# Altium PCB valfancontrollerALT.PcbDoc
Units mm, origin at the board's own origin, x right, y up, seen from the top; angles counter-clockwise.
Board outline 99.06 x 48.89 mm, 2 copper layers (Top Layer, Bottom Layer); 11 components, 20 nets, 87 pads, 32 vias.
Unrouted connection lines stored in the file: 10.
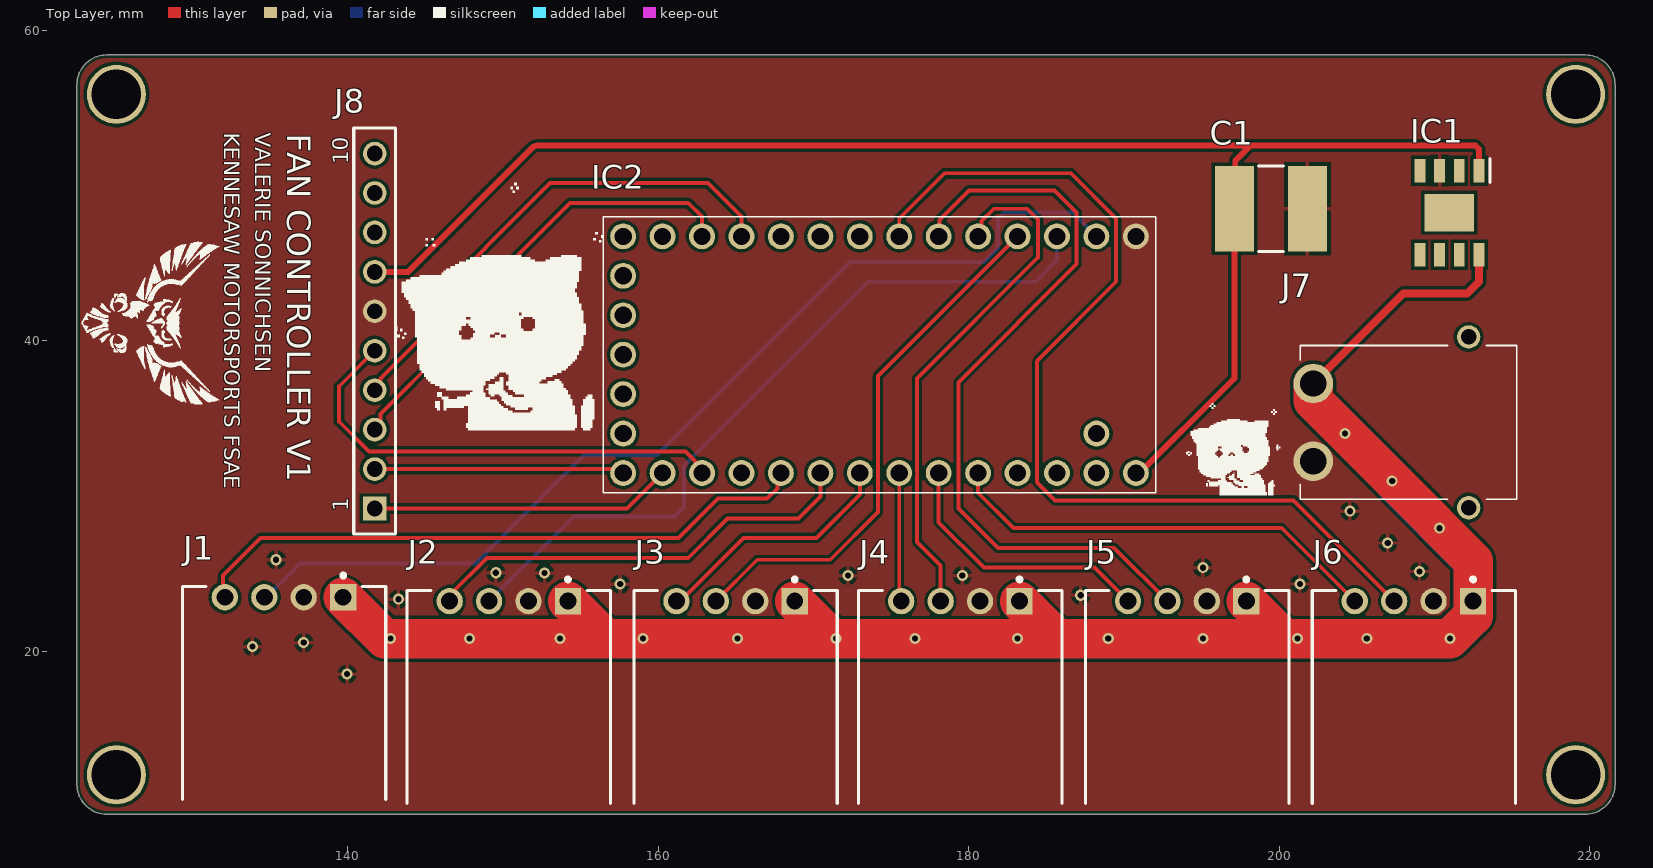
[diagram p0: Top Layer view]
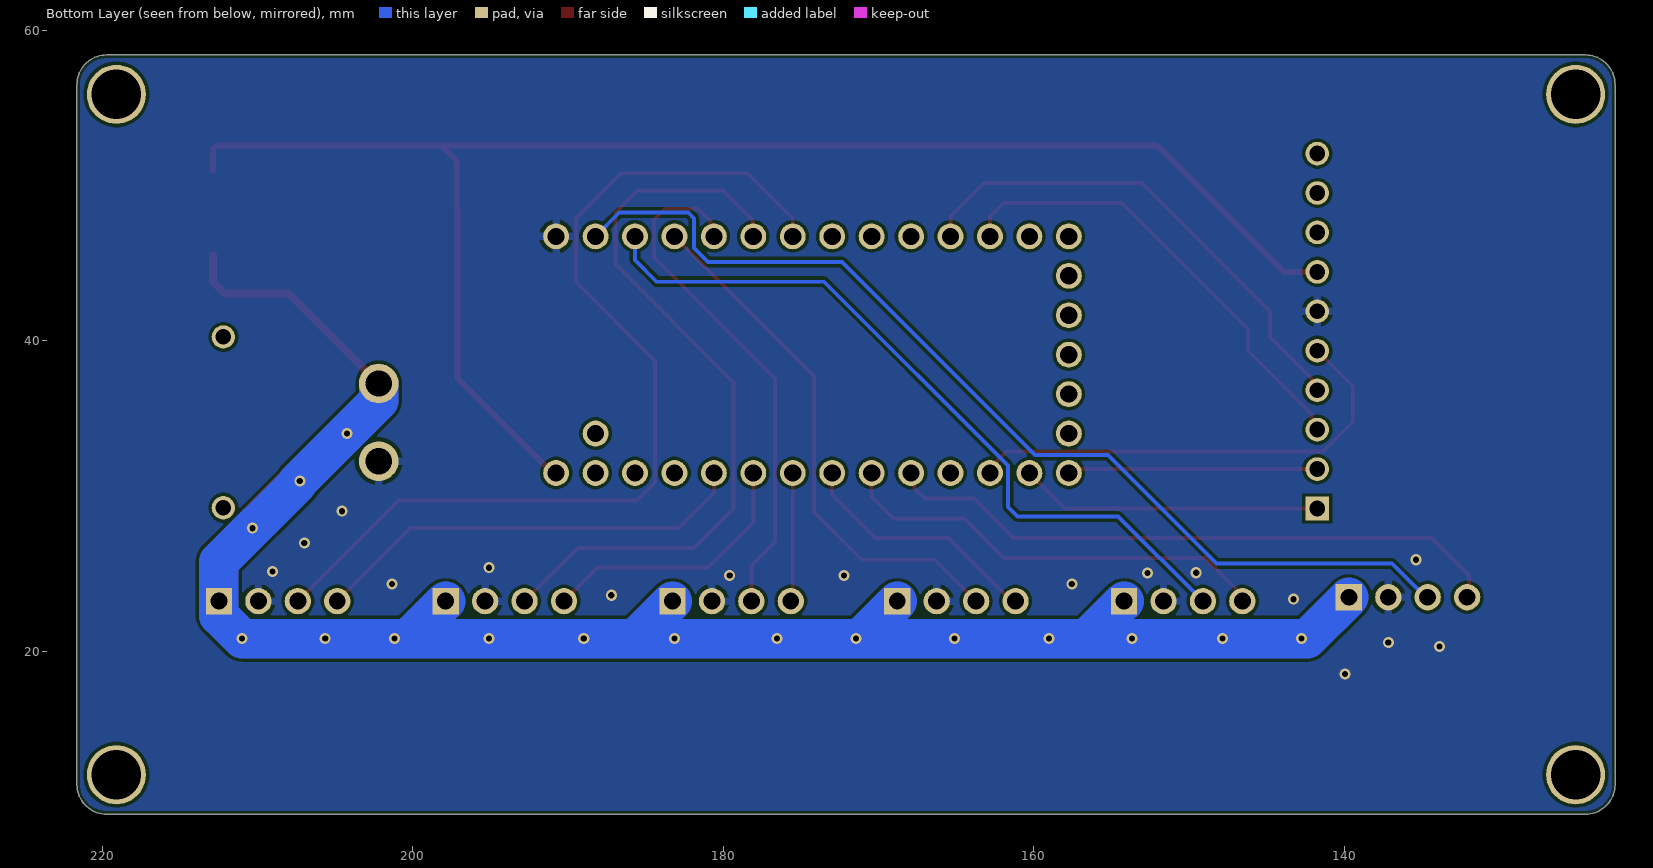
[diagram p1: Bottom Layer view, seen from below]
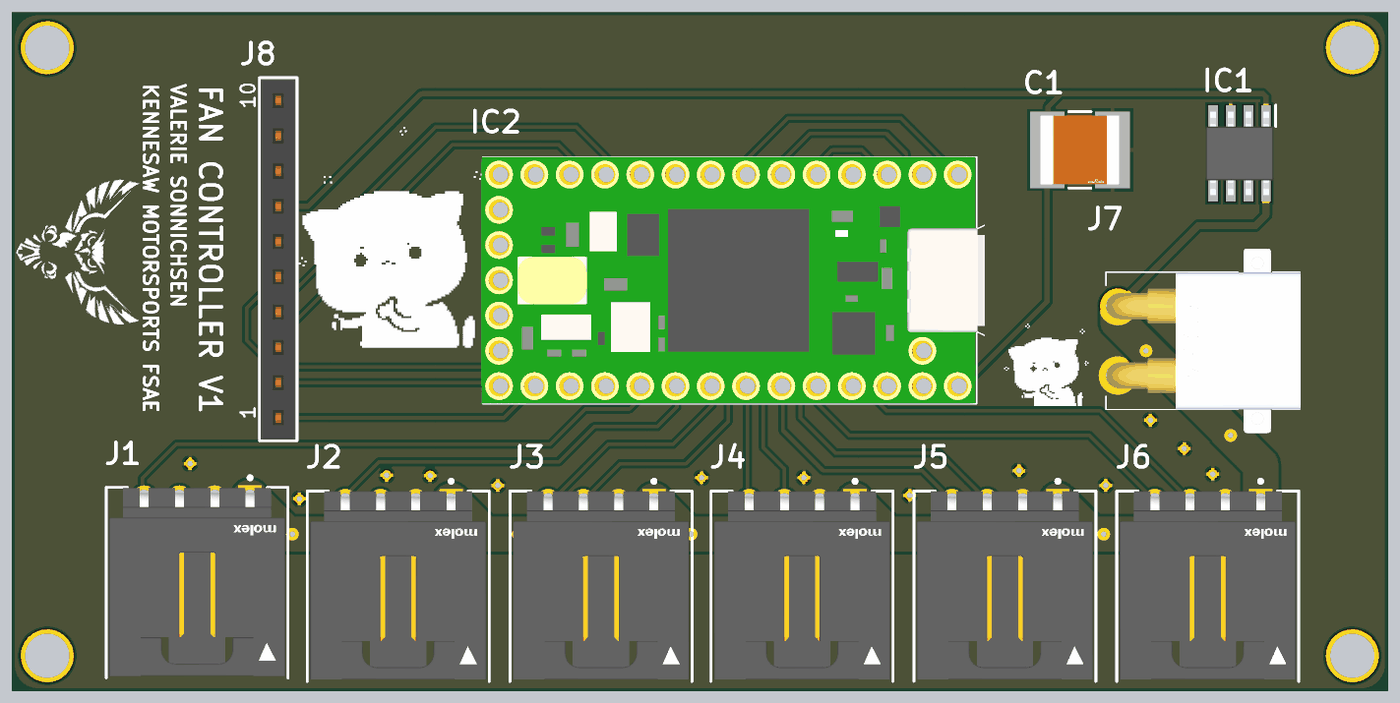
[diagram p2: 3D render of the assembled board from above, using the file's embedded part models]

## Layer stack, top to bottom
Top Solder: solder mask 0.0102, Solder Resist, Dk 3.5
Top Layer: signal copper 0.0356
Dielectric 1: dielectric 0.32, FR-4, Dk 4.8
Bottom Layer: signal copper 0.0356
Bottom Solder: solder mask 0.0102, Solder Resist, Dk 3.5

## Board outline
122.555,11.43 ccw(c124.46,11.43) 124.46,9.525 219.71,9.525 ccw(c219.71,11.43) 221.615,11.43 221.615,56.515 ccw(c219.71,56.515) 219.71,58.42 124.46,58.42 ccw(c124.46,56.515) 122.555,56.515

## Design rules (kind name [scope] priority, off if disabled: settings)
BoardOutlineClearance [All] p1: gap=0.2 ignorepadtopadclearanceinfootprint=FALSE except(0.4: Arc-SplitBarrior Arc-SplitContinuation Track-SplitBarrior Track-SplitContinuation SMDPad-SplitBarrior SMDPad-SplitContinuation THPad-SplitBarrior THPad-SplitContinuation Via-SplitBarrior Via-SplitContinuation Fill-SplitBarrior Fill-SplitContinuation Poly-SplitBarrior Poly-SplitContinuation Region-SplitBarrior Region-SplitContinuation Text-SplitBarrior Text-SplitContinuation)
Clearance "Clearance Bottom Layer" [OnLayer('Bottom Layer')] p1: gap=0.203 ignorepadtopadclearanceinfootprint=TRUE except(0.254: Arc-Text Track-Text SMDPad-Text THPad-Text Via-Text Fill-Text Poly-Text Region-Text Text-Text)
Clearance "Clearance Top Layer" [OnLayer('Top Layer')] p2: gap=0.203 ignorepadtopadclearanceinfootprint=TRUE except(0.254: Arc-Text Track-Text SMDPad-Text THPad-Text Via-Text Fill-Text Poly-Text Region-Text Text-Text)
Clearance [All] p3: gap=0.2 ignorepadtopadclearanceinfootprint=FALSE except(0.089: Arc-Arc Arc-Track Arc-SMDPad Track-Track Track-SMDPad SMDPad-SMDPad; 0.127: Arc-Via Track-Via SMDPad-Via THPad-Via Via-Via; 0.254: Arc-Text Track-Text SMDPad-Text THPad-Text Via-Text Fill-Text Poly-Text Region-Text Text-Text)
HoleSize [All] p1: absolutevalues=TRUE maxlimit=6.3 minlimit=0.2 maxpercent=80.000 minpercent=20.000
MinimumAnnularRing [All] p1: minimumring=0.076
MinimumSolderMaskSliver [All] p1: minsoldermaskwidth=0.1
PolygonConnect [All vs IsNamedPolygon('GND_L01_P001')] p1: thpad.connectstyle=Direct thpad.reliefconductorwidth=0.254 thpad.reliefentries=4 thpad.polygonreliefangle="90 Angle" thpad.airgapwidth=0.254 smdpad.connectstyle=Relief smdpad.reliefconductorwidth=0.254 smdpad.reliefentries=4 smdpad.polygonreliefangle="90 Angle" smdpad.airgapwidth=0.254 via.connectstyle=Relief via.reliefconductorwidth=0.254 via.reliefentries=4 via.polygonreliefangle="90 Angle" via.airgapwidth=0.254
PolygonConnect PolygonConnect_1 [All] p2: thpad.connectstyle=Relief thpad.reliefconductorwidth=0.508 thpad.reliefentries=4 thpad.polygonreliefangle="90 Angle" thpad.airgapwidth=0.254 smdpad.connectstyle=Relief smdpad.reliefconductorwidth=0.508 smdpad.reliefentries=4 smdpad.polygonreliefangle="90 Angle" smdpad.airgapwidth=0.254 via.connectstyle=Direct via.reliefconductorwidth=0.508 via.reliefentries=4 via.polygonreliefangle="90 Angle" via.airgapwidth=0.254
RoutingCorners [All] p1: cornerstyle=Round minsetback=2.54 maxsetback=2.54
RoutingVias [All] p1: holewidth=0.5 width=1 viastyle="Through Hole" minholewidth=0.2 minwidth=0.45 maxholewidth=1 maxwidth=2
SilkToSilkClearance [All] p1: silktosilkclearance=0.1
SilkToSolderMaskClearance [IsPad] p1: minsilkscreentomaskgap=0.1 clearancetoexposedcopper=TRUE
SolderMaskExpansion [All] p1: expansion=0.102 istentingtop=FALSE
Width [All] p1: maxlimit=2.54 minlimit=0.089 preferedwidth=0.381
25 further rules are at their usual default settings.

## Components (designator, comment, footprint, x,y, rotation, side; value= is the part's Value field where it differs from the comment)
C1 "GRM55DR72E105KW01L" FP-GRM55D-0_4-IPC_A 199.453,48.514 r0 top
IC1 "BD50GA5MEFJ-LBH2" SOIC127P600X100-9N 210.947,48.26 r270 top
IC2 "TEENSY_4.0" TEENSY40 190.754,46.736 r180 top
J1 "70553-0003" FP-70553-0003-MFG 135.89,17.399 r0 top
J2 "70553-0003" FP-70553-0003-MFG 150.368,17.145 r0 top
J3 "70553-0003" FP-70553-0003-MFG 164.973,17.145 r0 top
J4 "70553-0003" FP-70553-0003-MFG 179.451,17.145 r0 top
J5 "70553-0003" FP-70553-0003-MFG 194.056,17.145 r0 top
J6 "70553-0003" FP-70553-0003-MFG 208.661,17.145 r0 top
J7 "XT30PW-M" XT30PWM 208.096,34.758 r270 top
J8 "61301011821" 61301011821 141.732,40.64 r90 top (schematic designator J?)

## Footprints (in the part's own frame and the unit in brackets; to place one, negate y for a bottom-side part, rotate by r counter-clockwise, add the part's x,y. Pads: shape width x height; smd on the part's side, far side on the other; paste and mask are expansions set on the pad)
61301011821 [mm] "Socket Header, Pitch 2.54 mm, THT, Vertical, single row, 10p"
  rect 1.52x1.52 hole 1.02: 1(-11.43,0)
  round 1.52 hole 1.02: 2(-8.89,0) 3(-6.35,0) 4(-3.81,0) 5(-1.27,0) 6(1.27,0) 7(3.81,0) 8(6.35,0) 9(8.89,0) 10(11.43,0)
  silkscreen extent -13.08,-1.35 13.08,1.35, body extent -12.95,-1.25 12.95,1.25, height 8.55
FP-70553-0003-MFG [mm]
  rect 1.69x1.69 hole 1.09 paste-1000 mask+0: 1(3.81,6.095)
  round 1.69 hole 1.09 paste-1000 mask+0: 2(1.27,6.095) 3(-1.27,6.095) 4(-3.81,6.095)
  silkscreen extent -6.55,-6.93 6.55,7.62, body extent -6.65,-7.02 6.65,7.04, height 0.25
FP-GRM55D-0_4-IPC_A [mm]
  rect 2.502x5.503 smd paste+0 mask+0: 1(-2.35,0) 2(2.35,0)
  silkscreen extent -0.8,-2.75 0.8,2.75, body extent -4.1,-3.25 4.1,3.25, height 0.25
SOIC127P600X100-9N [mm]
  rect 1.525x0.7 smd: 1(-2.712,1.905) 2(-2.712,0.635) 3(-2.712,-0.635) 4(-2.712,-1.905) 5(2.712,-1.905) 6(2.712,-0.635) 7(2.712,0.635) 8(2.712,1.905)
  rect 2.4x3.2 smd: 9(0,0)
  silkscreen extent -3.47,2.61 -1.95,2.61, body extent -3,-2.45 3,2.45, height 1
TEENSY40 [mm]
  round 1.665 hole 1.11: 1(0,0) 2(2.54,0) 3(5.08,0) 4(7.62,0) 5(10.16,0) 6(12.7,0) 7(15.24,0) 8(17.78,0) 9(20.32,0) 10(22.86,0) 11(25.4,0) 12(27.94,0) 13(30.48,0) 14(33.02,0) 15(33.02,2.54) 16(33.02,5.08) 17(33.02,7.62) 18(33.02,10.16) 19(33.02,12.7) 20(33.02,15.24) 21(30.48,15.24) 22(27.94,15.24) 23(25.4,15.24) 24(22.86,15.24) 25(20.32,15.24) 26(17.78,15.24) 27(15.24,15.24) 28(12.7,15.24) 29(10.16,15.24) 30(7.62,15.24) 31(5.08,15.24) 32(2.54,15.24) 33(0,15.24) 34(2.54,12.7)
  silkscreen extent -1.27,-1.27 34.29,16.51, body extent -1.87,-1.27 34.39,16.51, height 4.55
XT30PWM [mm]
  round 2.55 hole 1.7: 1(-2.5,-5.912) 2(2.5,-5.912)
  round 1.5 hole 1: 3(5.5,4.088) 4(-5.5,4.088)
  silkscreen extent -4.95,-6.76 4.95,7.19, body extent -6.65,-6.71 6.65,7.24, height 5.06

## Part data
C1: library part CMP-2000-06370-2, "Chip Multilayer Ceramic Capacitors for General Purpose, 2220, 1.0uF, X7R, 15%, 10%, 250V", Capacitance=1uF, Case Code (Imperial)=2220, Case Code (Metric)=5750, Dielectric=X7R, Max Operating Temperature=125°C, Min Operating Temperature=-55°C, Package Quantity=1, Tolerance=10%, Voltage=250V, Case/Package=2220, Depth=5mm, Height=2mm, Lead Free="Lead Free", Length=5.7mm, Material=Ceramic, Mount="Surface Mount", Number of Pins=2, Packaging="Tape and Reel", REACH SVHC="No SVHC", Termination=SMD/SMT, Thickness=0.087inch, Voltage Rating=250V, Voltage Rating (DC)=250V, Width=5mm
IC1: "Integrated Circuit", Manufacturer_Name="ROHM Semiconductor", Datasheet Link=https://componentsearchengine.com/Datasheets/2/BD50GA5MEFJ-LBH2.pdf, Height=1mm, Manufacturer_Part_Number=BD50GA5MEFJ-LBH2
IC2: "Integrated Circuit", Manufacturer_Name=Teensy, Manufacturer_Part_Number="TEENSY 4.0", Datasheet Link=https://www.pjrc.com/store/teensy40.html, Height=4.64mm
J1 J2 J3 J4 J5 J6: library part CMP-04776-000256-1, "CONN HEADER R/A 4POS 2.54MM", Color=Black, Contact Resistance=30mR, Current Rating=3A, Flammability Rating="UL94 V-0", Insulation Resistance=1GR, Max Operating Temperature=105°C, Min Operating Temperature=-40°C, Package Quantity=1680, Voltage Rating=250V, Approvals=UL, Contact Material=Bronze, Contact Plating=Gold, ELV=Compliant, Gender=Male, Glow Wire Compliant=Non-compliant, Housing Color=Black, Housing Material=Polycyclohexylenedimethylene, Lead Free="Lead Free", Material=Brass, Mount="Through Hole", Number of Circuits=4, Number Of Contacts=4, Number of Positions=4, Number Of Rows=1, Orientation="Right Angle", Packaging=Rail/Tube, Pitch=2.54mm, Series=70553, Termination="Through Hole", Voltage Rating (DC)=250V
J7: "Connector", Manufacturer_Name=Amass, Datasheet Link=https://www.tme.eu/sl/Document/ce4077e36b79046da520ca73227e15de/XT30PW%20SPEC.pdf, Height=5mm, Manufacturer_Part_Number=XT30PW-M
J8: library part CMP-1502-01332-1, "THT Vertical Socket Header WR-PHD, Pitch 2.54 mm, Single Row, 10 pins", Contact Resistance=20mOhm, Manufacturer="Wurth Elektronik", Operating Temperature=-40to125degC, Rated Current=3A, Withstanding Voltage=500VAC, Working Voltage=250VAC, Datasheet URL=https://katalog.we-online.de/em/datasheet/6130xx11821.pdf, Gender=Female, Manufacturer URL=http://www.we-online.de, Mounting Technology=THT, Orientation=Vertical, Package Reference=61301011821, Packaging=Tray, Part Number=61301011821, Pin Number=10, Pitch=2.54mm, Publisher=WurthElektronik, Row Number=Single

## Free pads (board coordinates)
  round 3.81 hole 3.188: 2(125.095,12.065) 2(125.095,55.88) 2(219.075,12.065) 2(219.075,55.88)

## Via types
v1: diameter 0.711, hole 0.4, Top Layer to Bottom Layer, 32 vias

## Nets (pads, with @x,y where several pads share a name; then routed paths per layer and width w, separated by ;. In a path a pad name is that pad's centre, name@x,y a point inside that pad or via, vN(x,y) a via of type N, cw(c..) or ccw(c..) an arc to the next point about the centre after c; other vN are vias at no path point)
5V: C1.1 IC1.1 IC2.33 J8.7 | length 100.6
  Top Layer w0.381: J8.7 143.891,44.45 151.907,52.466 cw(c152.177,52.197) 152.177,52.578 198.12,52.578 ; IC2.33@190.595,31.083 197.102,37.59 C1.1 197.156,48.568 197.156,51.614 198.12,52.578 ; IC1.1 212.852,52.355 212.629,52.578 198.12,52.578
CS: IC2.22 J8.5 | length 30.6
  Top Layer w0.254: J8.5 139.446,37.084 139.446,34.798 141.371,32.873 157.734,32.873 161.742,32.873 IC2.22@163.119,31.496
GND: C1.2 IC1.3 IC2.1 J1.2 J2.2 J3.2 J4.2 J5.2 J6.2 J7.2 J8.6
  other v1: 139.954,18.542 133.858,20.32 137.16,20.574 143.256,23.368 187.198,23.622 157.543,24.339 201.319,24.346 172.212,24.892 179.578,24.892 152.669,25.048 149.534,25.071 209.022,25.153 195.072,25.4 135.382,25.908 206.972,26.989 204.541,29.039
INT: IC2.21 J8.1 | length 19.5
  Top Layer w0.254: J8.1 157.988,29.21 IC2.21
"PWM 1": IC2.2 J1.3 | length 65.8
  Bottom Layer w0.254: J1.3@134.493,23.24 136.907,25.654 148.209,25.654 155.214,32.659 159.913,32.659 172.339,45.085 180.975,45.085 181.864,45.974 181.864,47.879 182.245,48.26 186.69,48.26 IC2.2
"PWM 2": IC2.3 J2.3 | length 48.8
  Bottom Layer w0.254: J2.3 154.56,28.702 161.036,28.702 161.651,29.317 161.651,31.978 173.489,43.815 184.277,43.815 185.674,45.212 IC2.3
"PWM 3": IC2.4 J3.3 | length 34.3
  Top Layer w0.254: J3.3 166.371,25.908 171.069,25.908 174.137,28.976 174.137,37.739 IC2.4
"PWM 4": IC2.5 J4.3 | length 33.8
  Top Layer w0.254: J4.3 178.181,25.527 176.657,27.051 176.657,31.283 ccw(c175.514,31.496) 176.657,31.709 176.657,37.592 184.437,45.372 184.437,47.825 183.747,48.514 181.61,48.514 180.817,47.721 180.817,46.959 IC2.5
"PWM 5": IC2.6 J5.3 | length 49.4
  Top Layer w0.254: IC2.6 178.103,46.785 178.103,47.801 179.997,49.695 185.509,49.695 186.944,48.26 186.944,44.958 179.324,37.338 179.324,29.21 181.864,26.67 189.356,26.67 J5.3
"PWM 6": IC2.7 J6.3 | length 62.8
  Top Layer w0.254: IC2.7 175.514,47.879 178.435,50.8 186.563,50.8 189.484,47.879 189.484,43.815 184.478,38.809 ccw(c184.68,38.608) 184.395,38.608 184.395,30.975 ccw(c184.649,30.975) 184.469,30.796 185.547,29.718 200.913,29.718 J6.3
SCK: IC2.20 J8.2 | length 17.3
  Top Layer w0.254: J8.2@142.103,31.984 141.999,31.984 141.927,31.921 J8.2 157.48,31.75 IC2.20 IC2.20@157.213,30.975
SI: IC2.12 J8.3 | length 30
  Top Layer w0.254: J8.3 141.732,34.598 142.102,34.968 142.102,35.295 146.177,39.37 146.177,40.767 154.305,48.895 161.925,48.895 162.814,48.006 IC2.12
SO: IC2.11 J8.4 | length 32.8
  Top Layer w0.254: J8.4 141.732,37.138 142.102,37.508 142.102,37.581 144.78,40.259 144.78,41.91 153.035,50.165 163.195,50.165 165.354,48.006 IC2.11 ; IC2.11@165.012,46.394 IC2.11@165.012,46.731
"SQ 1": IC2.24 J1.4 | length 40.8
  Top Layer w0.254: J1.4@131.953,23.24 131.953,24.892 134.366,27.305 161.29,27.305 163.83,29.845 167.005,29.845 167.671,30.511 167.671,31.273 IC2.24
"SQ 2": IC2.25 J2.4 | length 28.4
  Top Layer w0.254: J2.4 146.558,23.622 148.971,26.035 161.925,26.035 164.465,28.575 169.037,28.575 170.434,29.972 IC2.25
"SQ 3": IC2.26 J3.4 | length 16
  Top Layer w0.254: J3.4@161.416,23.24 165.481,27.305 170.18,27.305 172.974,30.099 IC2.26
  Top Layer w0.381: J3.4 J3.4@161.416,23.24
"SQ 4": IC2.27 J4.4 | length 8.3
  Top Layer w0.254: IC2.27 175.514,23.367 J4.4
"SQ 5": IC2.28 J5.4 | length 17.5
  Top Layer w0.254: IC2.28 178.054,28.321 180.975,25.4 188.086,25.4 J5.4
"SQ 6": IC2.29 J6.4 | length 28.4
  Top Layer w0.254: IC2.29 180.594,30.226 182.88,27.94 200.151,27.94 J6.4
VIN: IC1.8 J1.1 J2.1 J3.1 J4.1 J5.1 J6.1 J7.1 | length 229.8
  Top Layer w0.508: J7.1 207.979,43.053 212.09,43.053 212.852,43.815 IC1.8
  Top Layer w2.54: J1.1 142.366,20.828 156.59,20.828 ; J2.1 156.59,20.828 ; J3.1 v1@171.195,20.828 ; J4.1 185.673,20.828 ; J5.1 200.278,20.828 ; J7.1 202.186,37.256 202.186,36.143 209.961,28.368 209.961,28.337 212.471,25.827 212.471,22.316 v1(210.983,20.828) 200.278,20.828 ; 156.59,20.828 v1@171.195,20.828 ; v1@171.195,20.828 185.673,20.828 ; 185.673,20.828 200.278,20.828
  Bottom Layer w2.54: J1.1 142.366,20.828 156.59,20.828 ; J2.1 156.59,20.828 ; J3.1 v1@171.195,20.828 ; J4.1 185.673,20.828 ; J5.1 200.278,20.828 ; J7.1 202.186,37.256 202.186,36.143 207.392,30.937 207.392,30.86 212.471,25.781 212.471,22.316 v1(210.983,20.828) 200.278,20.828 ; 156.59,20.828 v1@171.195,20.828 ; v1@171.195,20.828 185.673,20.828 ; 185.673,20.828 200.278,20.828
  other v1: 142.748,20.828 147.828,20.828 153.67,20.828 159.004,20.828 165.1,20.828 171.45,20.828 176.53,20.828 183.134,20.828 188.976,20.828 195.072,20.828 201.168,20.828 205.631,20.828 210.312,27.94 207.264,30.988 204.216,34.036
pads on no net: IC1.2 IC1.4 IC1.5 IC1.6 IC1.7 IC1.9 IC2.8 IC2.9 IC2.10 IC2.13 IC2.14 IC2.15 IC2.16 IC2.17 IC2.18 IC2.19 IC2.23 IC2.30 IC2.31 IC2.32 IC2.34 J7.3 J7.4 J8.8 J8.9 J8.10

## Polygon pours and split planes (outlines as drawn)
GND on Bottom Layer "GND_L02_P002" (solid, pour order 2): 122.548,58.42 221.615,58.42 221.615,9.525 122.735,9.525
GND on Top Layer "GND_L01_P001" (solid, pour order 1): 122.548,58.42 221.615,58.42 221.615,9.525 122.735,9.525

## Silkscreen, mask and mechanical layers (free items; w line width, h text height)
Top Overlay:
  drawing of 93 lines, arcs and shapes, not listed
  text "KENNESAW MOTORSPORTS FSAE" at 132.052,53.395 h1 r270
  text "VALERIE SONNICHSEN" at 134.052,53.395 h1 r270
  text "FAN CONTROLLER V1" at 136.106,53.341 h1.52 r270
Mechanical 13:
  the board outline again, w0.254

## Text inside footprints (layer, text, board x,y; h text height)
J8: Top Overlay "10" at 140.032,51.39 h1.02 r90; Top Overlay "1" at 140.032,29.02 h1.02 r90